# Altium PCB OHIS_FT65E.PcbDoc
Units mm, origin at the board's own origin, x right, y up, seen from the top; angles counter-clockwise.
Board outline 42.5 x 25 mm, 4 copper layers (Top Layer, Layer 2, Layer 3, Bottom Layer), stack 1.513 mm thick; 35 components, 25 nets, 91 pads, 100 vias.
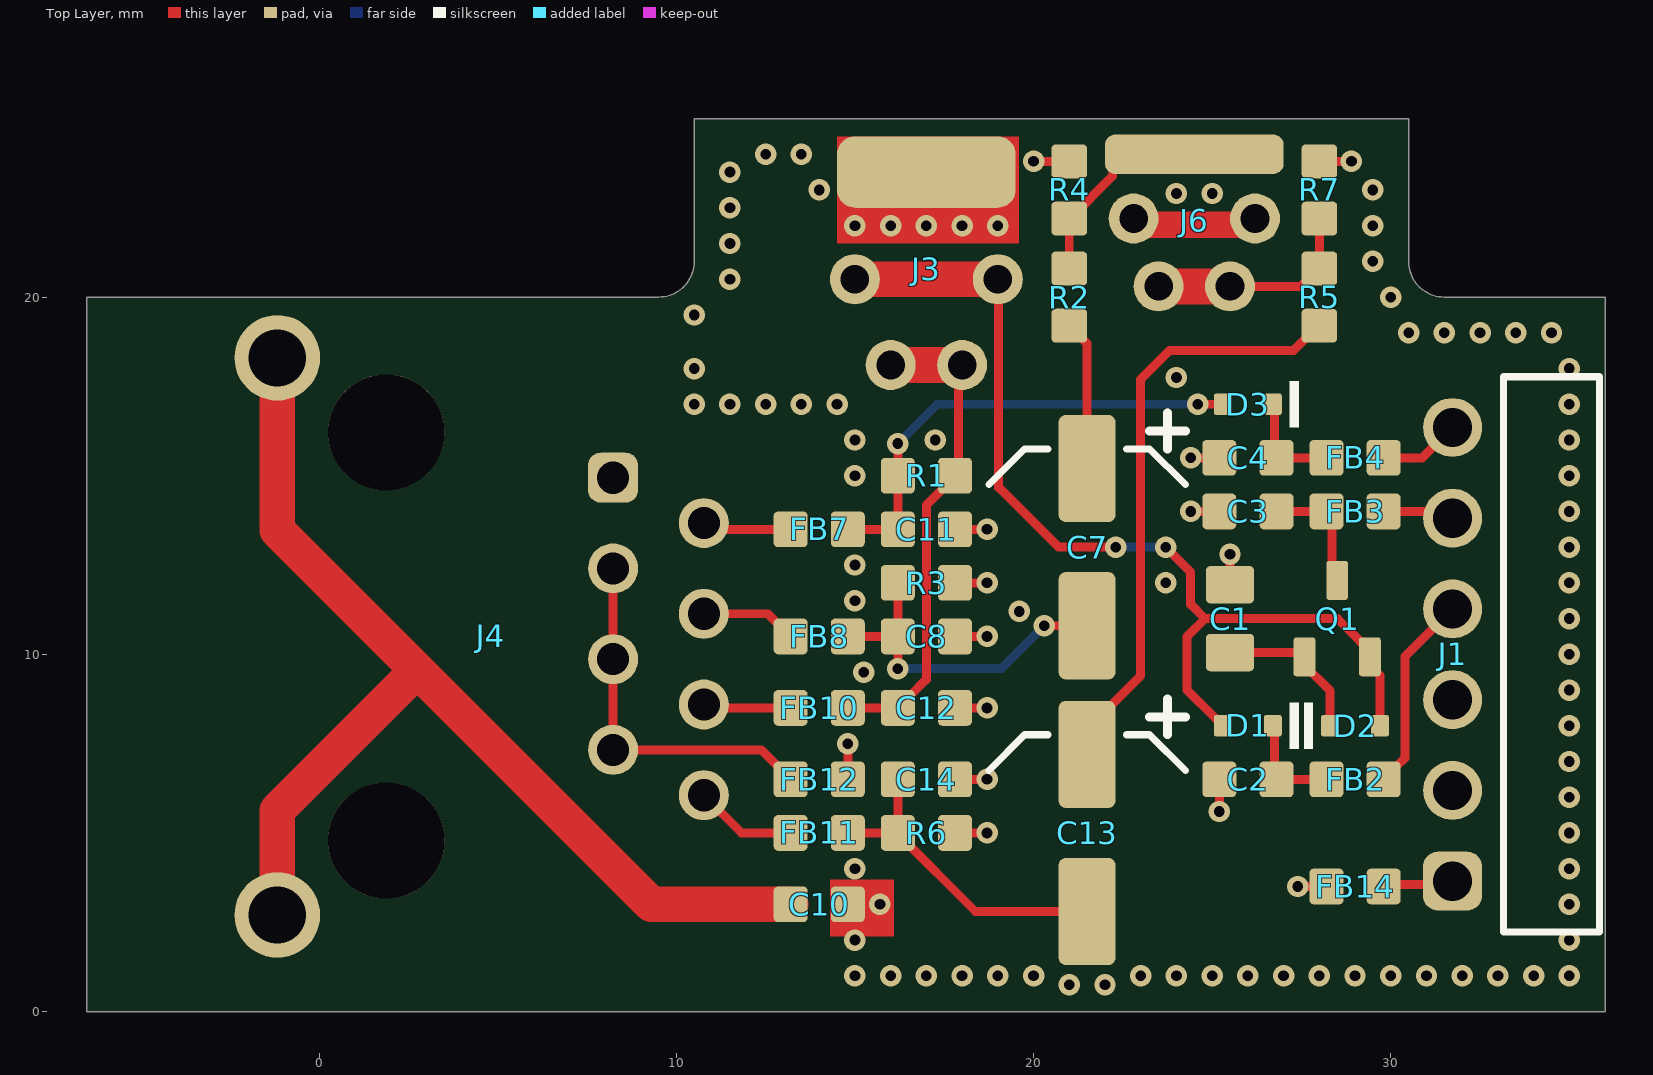
[diagram p0: Top Layer view]
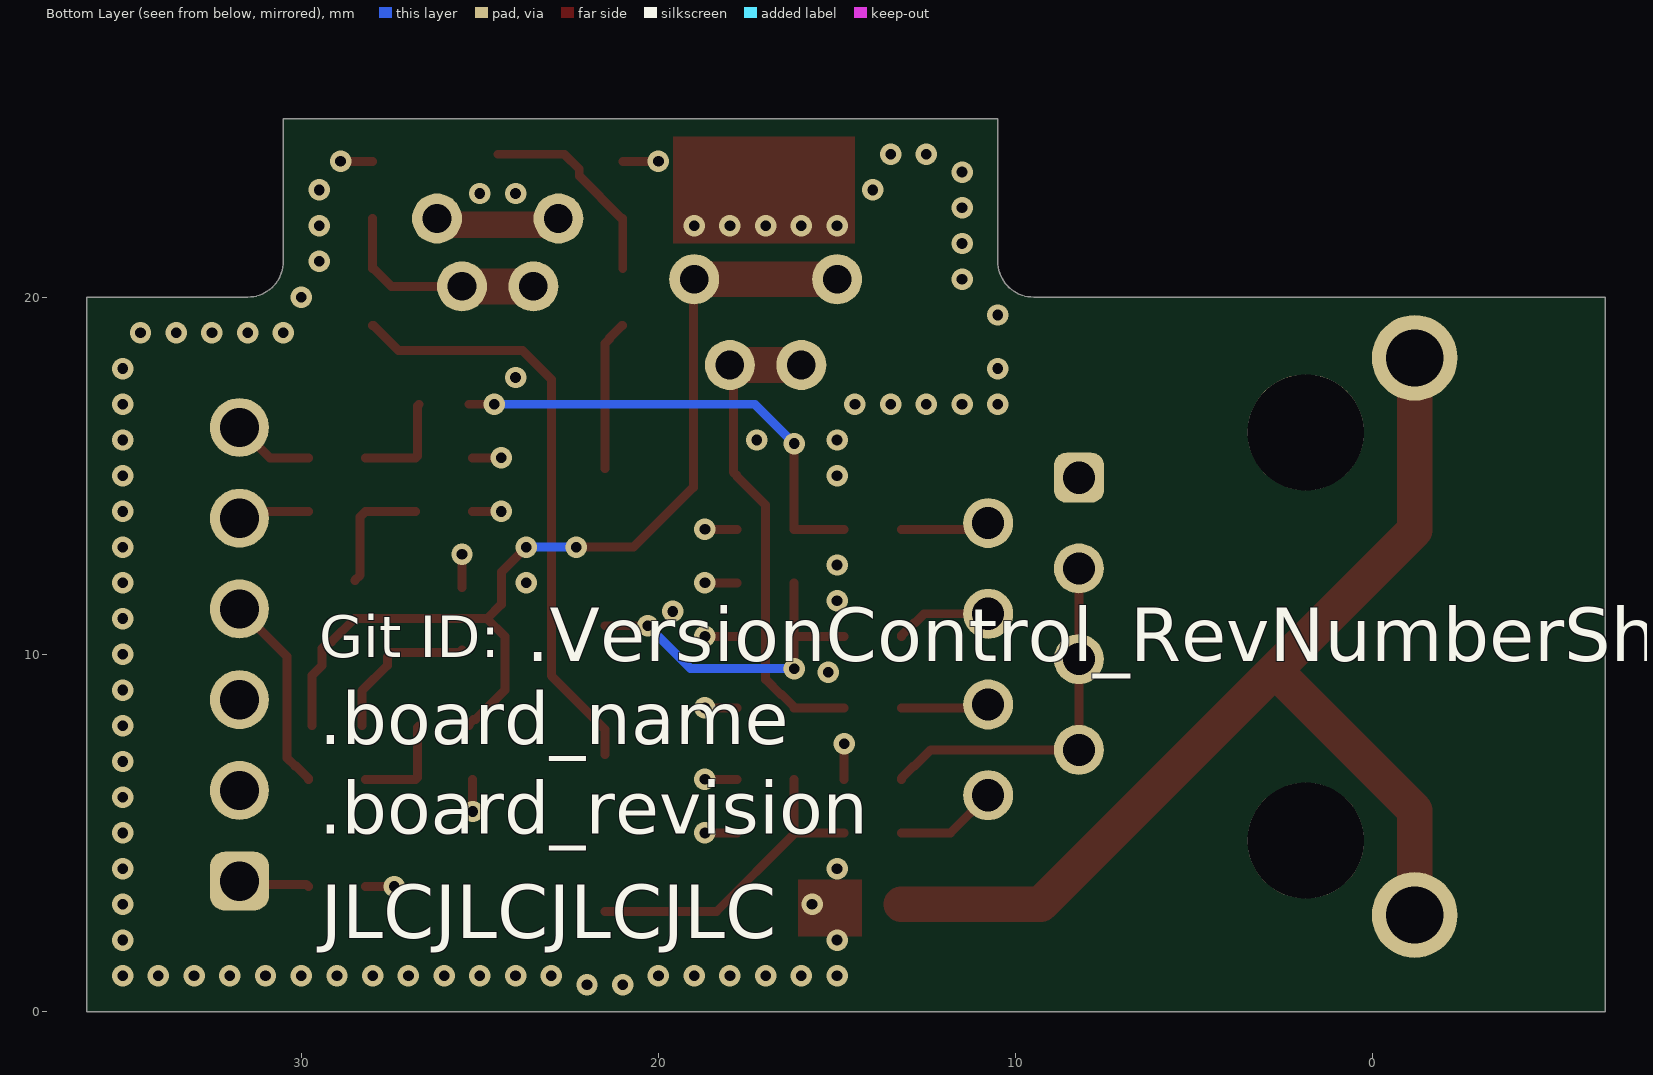
[diagram p1: Bottom Layer view, seen from below]
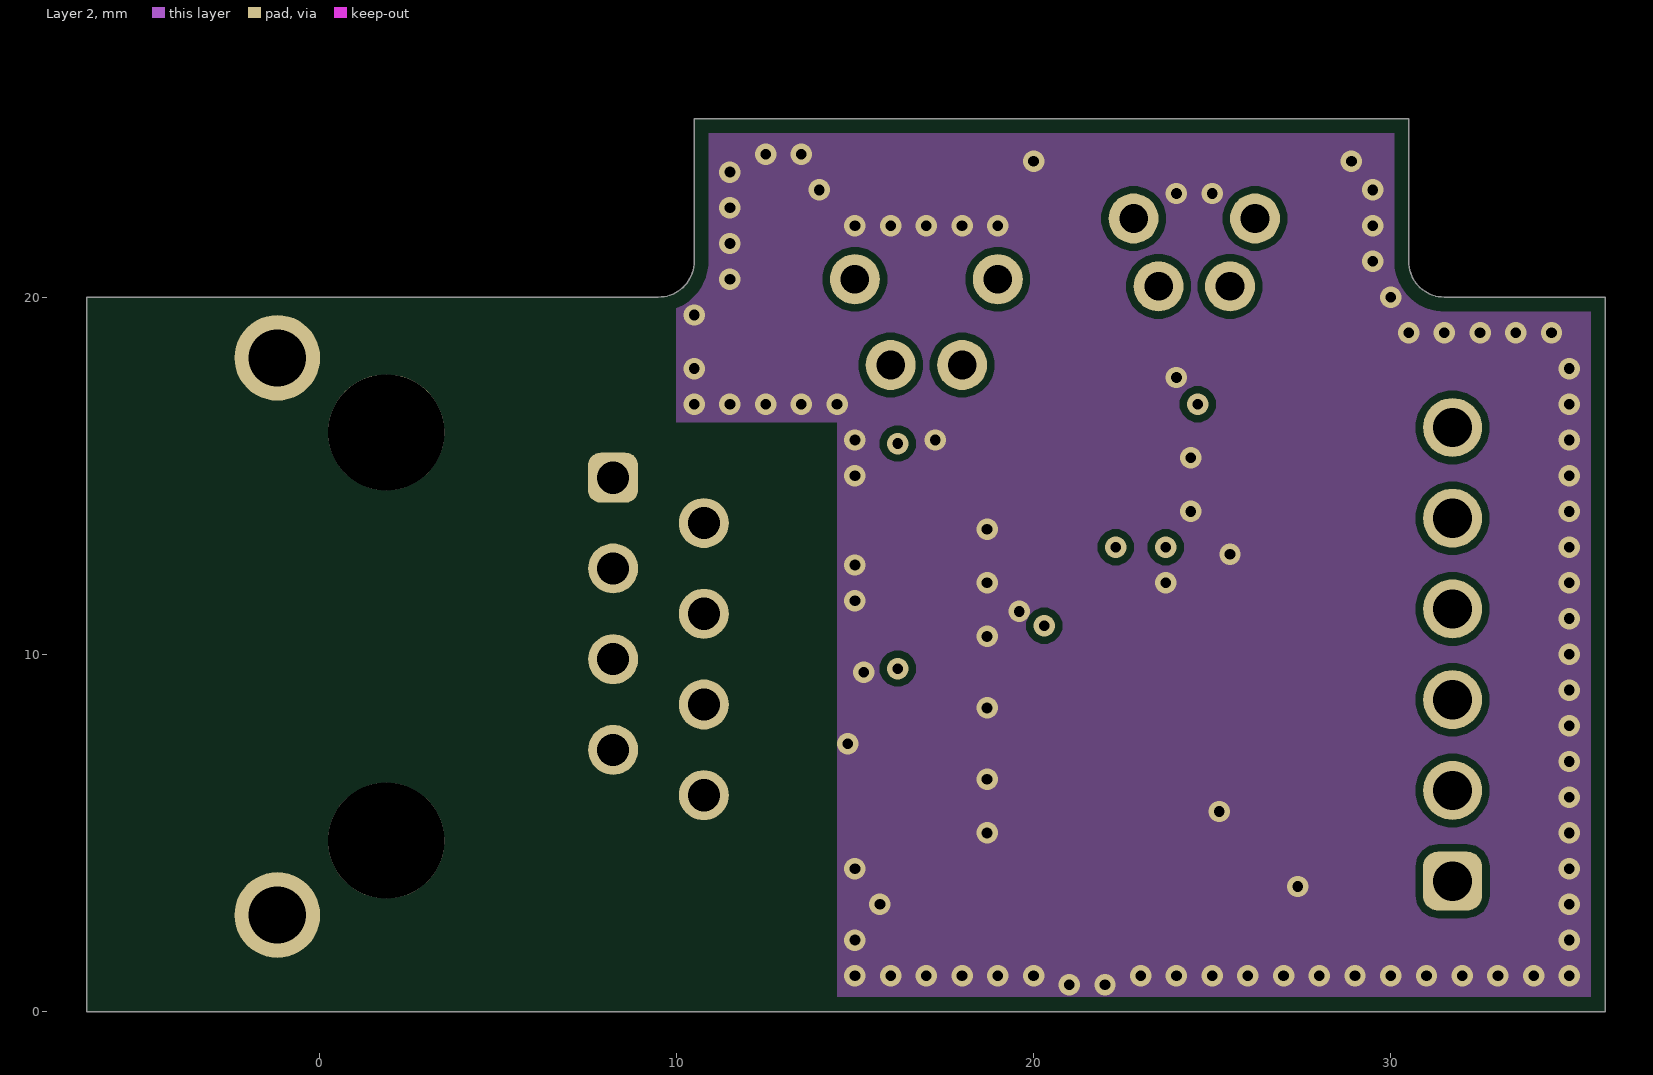
[diagram p2: Layer 2]
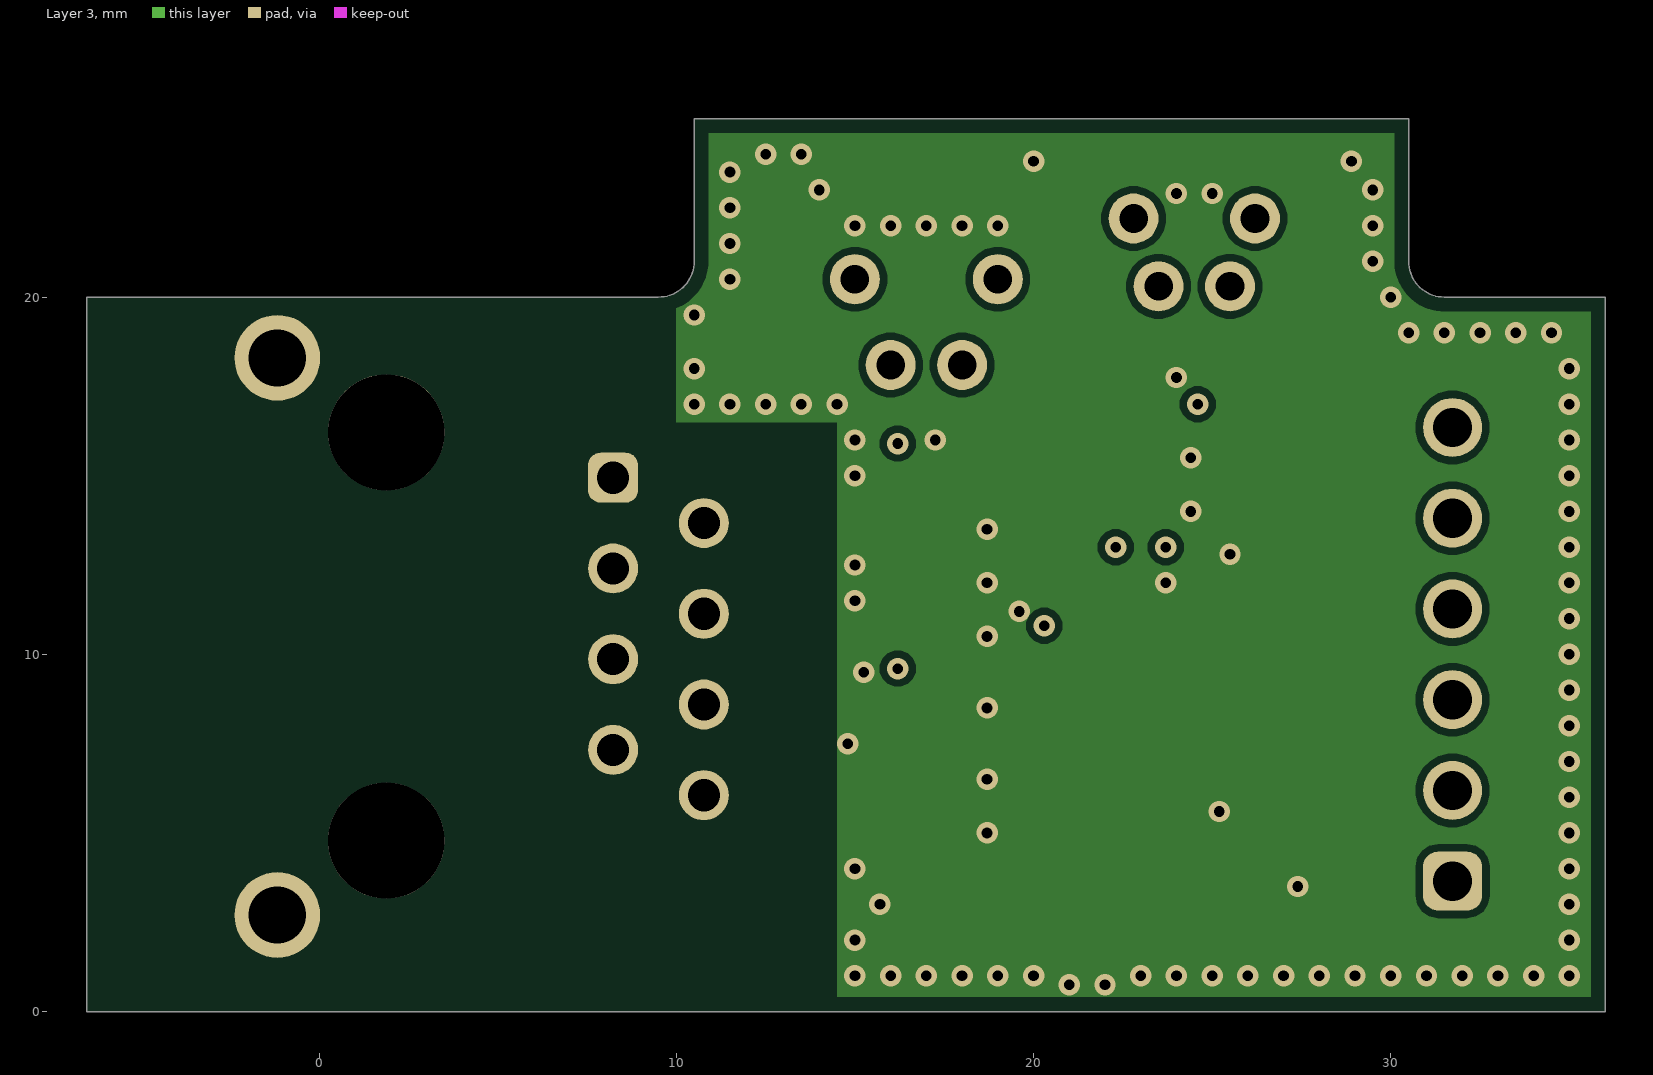
[diagram p3: Layer 3]
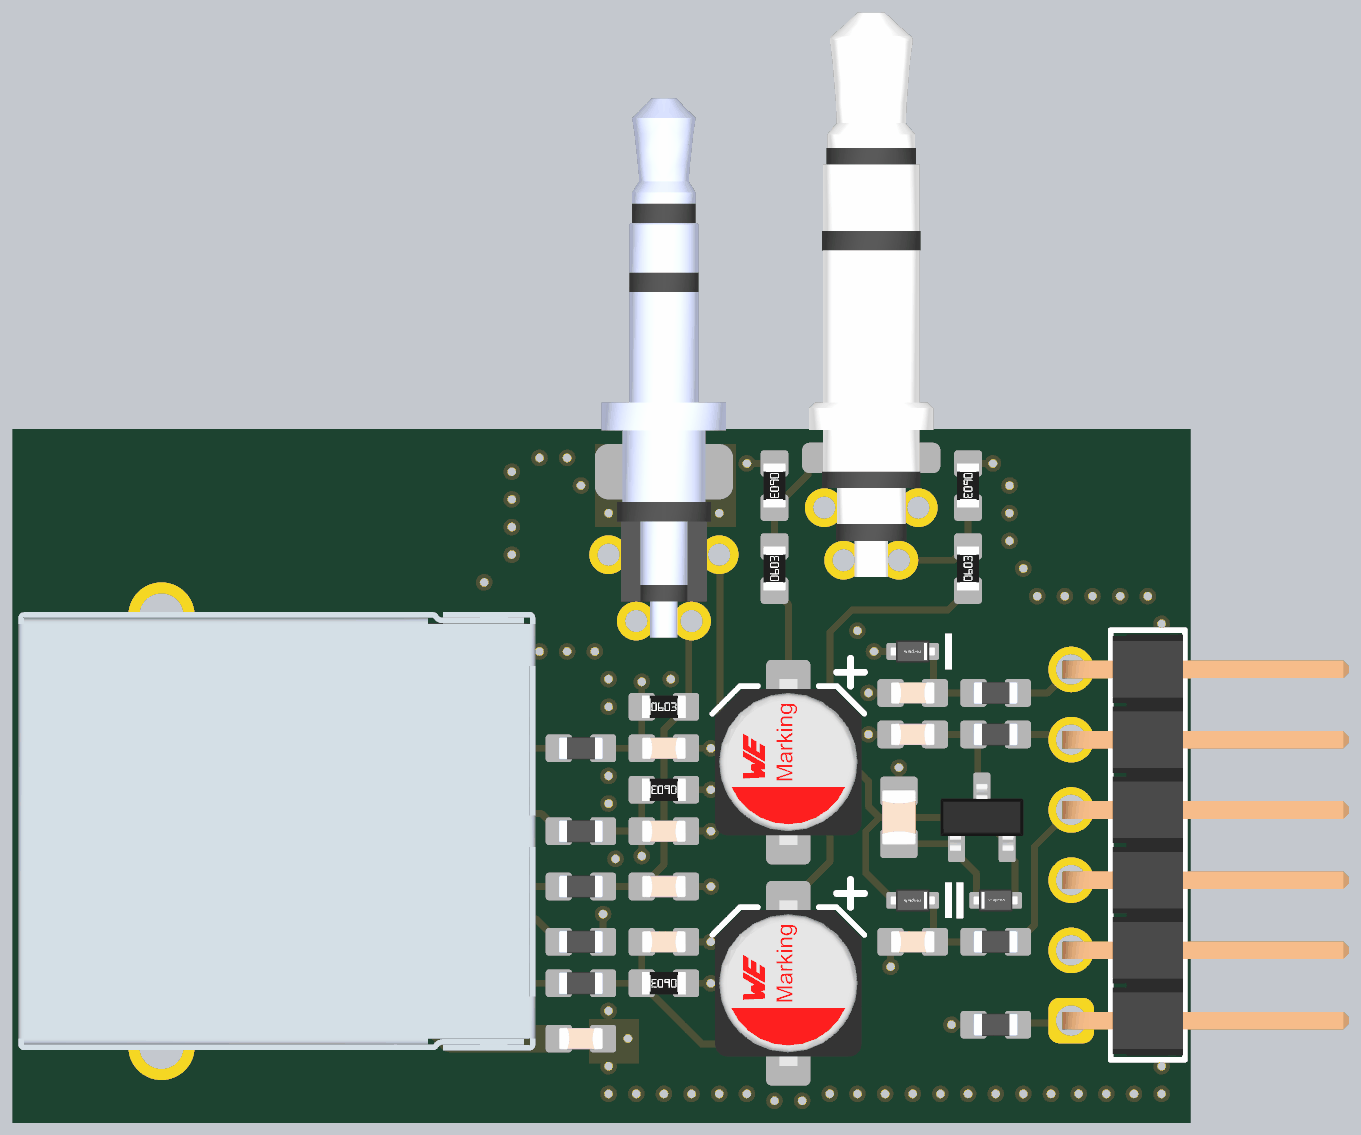
[diagram p4: 3D render of the assembled board from above, using the file's embedded part models]

## Layer stack, top to bottom
Top Solder: solder mask 0.0254, SM-001, Dk 4
Top Layer: signal copper 0.035
Dielectric 2: prepreg 0.2083, PP-022, Dk 4.5
Layer 2: signal copper 0.018
Dielectric 3: core 0.9906, Core-042, Dk 4.6
Layer 3: signal copper 0.018
Dielectric 5: prepreg 0.2083, PP-022, Dk 4.5
Bottom Layer: signal copper 0.035
Bottom Solder: solder mask 0.0254, SM-001, Dk 4

## Board outline
-6.5,0 -6.5,20 9.5,20 ccw(c9.5,21) 10.5,21 10.5,25 30.5,25 30.5,21 ccw(c31.5,21) 31.5,20 36,20 36,0

## Design rules (kind name [scope] priority, off if disabled: settings)
BoardOutlineClearance [IsElectrical or IsPoly] p1: gap=0.4 ignorepadtopadclearanceinfootprint=FALSE
Clearance Clearance_NTPH_to_Track [IsTrack vs IsPad and IsThruPin and not PadIsPlated] p1: gap=0.254 ignorepadtopadclearanceinfootprint=TRUE
Clearance Clearance_TH_Pad_to_TH_Pad [IsPad and IsThruPin vs IsPad and IsThruPin] p2: gap=0.5 ignorepadtopadclearanceinfootprint=TRUE
Clearance Clearance_SMT_Pad_to_SMT_Pad [IsPad and IsSMTPin vs IsPad and IsSMTPin] p3: gap=0.2 ignorepadtopadclearanceinfootprint=TRUE
Clearance [All] p4: gap=0.2 ignorepadtopadclearanceinfootprint=FALSE
DiffPairsRouting HDMI [InDifferentialPairClass('HDMI')] p1: maxlimit=0.254 minlimit=0.2 mostfreqgap=0.254 toplayer_maxgap=0.2 toplayer_prefgap=0.2 toplayer_minwidth=0.207 toplayer_maxwidth=0.207 toplayer_prefwidth=0.207 midlayer1_minwidth=0.381 midlayer1_maxwidth=0.381 midlayer1_prefwidth=0.381 midlayer2_minwidth=0.381 midlayer2_maxwidth=0.381 midlayer2_prefwidth=0.381 bottomlayer_maxgap=0.2 bottomlayer_prefgap=0.2 bottomlayer_minwidth=0.207 bottomlayer_maxwidth=0.207 bottomlayer_prefwidth=0.207 impedanceprofiledriven=TRUE impedanceprofileid={C10371E8-B84A-4044-89B9-1F0E894B0926} maxuncoupledlength=12.7
DiffPairsRouting ETH [InDifferentialPairClass('ETH')] p2: maxlimit=0.254 minlimit=0.2 mostfreqgap=0.254 toplayer_maxgap=0.2 toplayer_prefgap=0.2 toplayer_minwidth=0.207 toplayer_maxwidth=0.207 toplayer_prefwidth=0.207 midlayer1_minwidth=0.381 midlayer1_maxwidth=0.381 midlayer1_prefwidth=0.381 midlayer2_minwidth=0.381 midlayer2_maxwidth=0.381 midlayer2_prefwidth=0.381 bottomlayer_maxgap=0.2 bottomlayer_prefgap=0.2 bottomlayer_minwidth=0.207 bottomlayer_maxwidth=0.207 bottomlayer_prefwidth=0.207 impedanceprofiledriven=TRUE impedanceprofileid={C10371E8-B84A-4044-89B9-1F0E894B0926} maxuncoupledlength=12.7
DiffPairsRouting USB [InDifferentialPairClass('USB')] p3: maxlimit=0.2 minlimit=0.2 mostfreqgap=0.2 toplayer_minwidth=0.272 toplayer_maxwidth=0.272 toplayer_prefwidth=0.272 midlayer1_minwidth=0.381 midlayer1_maxwidth=0.381 midlayer1_prefwidth=0.381 midlayer2_minwidth=0.381 midlayer2_maxwidth=0.381 midlayer2_prefwidth=0.381 bottomlayer_minwidth=0.272 bottomlayer_maxwidth=0.272 bottomlayer_prefwidth=0.272 impedanceprofiledriven=TRUE impedanceprofileid={14A1D308-0AEB-453A-BA91-52939657512A} maxuncoupledlength=12.7
HoleSize NPTH_HoleSize [IsPad And not PadIsPlated] p1: absolutevalues=TRUE maxlimit=3.7 minlimit=0.2 maxpercent=80.000 minpercent=20.000
HoleSize Pad_HoleSize [IsPad] p2: absolutevalues=TRUE maxlimit=2.8 minlimit=0.5 maxpercent=80.000 minpercent=20.000
HoleSize Via_HoleSize [IsVia] p3: absolutevalues=TRUE maxlimit=6.3 minlimit=0.2 maxpercent=80.000 minpercent=20.000
HoleToHoleClearance [All] p1: gap=0.254 allowstackedmicrovias=FALSE
MatchedLengths InterPair_skew_HDMI [InDifferentialPairClass('HDMI')] p1: tolerance=1 checknetsindiffpair=FALSE checkdiffpairvsdiffpair=TRUE checkxsignals=TRUE checkothers=TRUE
MatchedLengths IntraPair_skew_all_DiffPairs [InDifferentialPairClass('All Differential Pairs')] p2: tolerance=0.15 checknetsindiffpair=TRUE checkdiffpairvsdiffpair=FALSE checkxsignals=FALSE checkothers=FALSE
MinimumAnnularRing [All] p1: minimumring=0.13
MinimumSolderMaskSliver [All] p1: minsoldermaskwidth=0.2
PolygonConnect [All] p1: thpad.connectstyle=Relief thpad.reliefconductorwidth=0.5 thpad.reliefentries=4 thpad.polygonreliefangle="90 Angle" thpad.airgapwidth=0.254 smdpad.connectstyle=Direct smdpad.reliefconductorwidth=0.5 smdpad.reliefentries=4 smdpad.polygonreliefangle="90 Angle" smdpad.airgapwidth=0.254 via.connectstyle=Direct via.reliefconductorwidth=0.5 via.reliefentries=4 via.polygonreliefangle="90 Angle" via.airgapwidth=0.254
RoutingVias [All] p1: holewidth=0.3 width=0.6 viastyle="Through Hole" minholewidth=0.2 minwidth=0.4 maxholewidth=0.711 maxwidth=1.27
SilkToSolderMaskClearance [IsPad] p1: minsilkscreentomaskgap=0.2 clearancetoexposedcopper=TRUE
SolderMaskExpansion SolderMaskExpansion_Via [IsVia] p1: expansion=0.102 istentingtop=TRUE
SolderMaskExpansion SolderMaskExpansion_notVia [not IsVia] p2: expansion=0.05 istentingtop=FALSE
Width [All] p1: maxlimit=2.5 minlimit=0.2 preferedwidth=0.33
25 further rules are at their usual default settings.

## Components (designator, comment, footprint, x,y, rotation, side; value= is the part's Value field where it differs from the comment)
C1 "Capacitor 1µF +/-10% 10V X7R 0805" 0805-C-N 25.5,11 r270 top value=1µF
C2 "Capacitor 1nF +/-10% 50V X7R 0603" 0603-C-N 26,6.5 r0 top value=1nF
C3 "Capacitor 1nF +/-10% 50V X7R 0603" 0603-C-N 26,14 r0 top value=1nF
C4 "Capacitor 1nF +/-10% 50V X7R 0603" 0603-C-N 26,15.5 r0 top value=1nF
C7 "865080142007" WCAP-ASLI_D5H5.5 21.5,13 r270 top
C8 "Capacitor 100nF +/-10% 50V X7R 0603" 0603-C-N 17,10.5 r180 top value=100nF
C10 "Capacitor 100nF +/-10% 50V X7R 0603" 0603-C-N 14,3 r180 top value=100nF
C11 "Capacitor 1nF +/-10% 50V X7R 0603" 0603-C-N 17,13.5 r180 top value=1nF
C12 "Capacitor 1nF +/-10% 50V X7R 0603" 0603-C-N 17,8.5 r180 top value=1nF
C13 "865080142007" WCAP-ASLI_D5H5.5 21.5,5 r270 top
C14 "Capacitor 100nF +/-10% 50V X7R 0603" 0603-C-N 17,6.5 r180 top value=100nF
D1 "1PS79SB30,115" FP-SOD523-MFG 26,8 r180 top
D2 "1PS79SB30,115" FP-SOD523-MFG 29,8 r0 top
D3 "1PS79SB30,115" FP-SOD523-MFG 26,17 r180 top
FB2 "742792662" 0603-FB-N 29,6.5 r180 top
FB3 "742792662" 0603-FB-N 29,14 r180 top
FB4 "742792662" 0603-FB-N 29,15.5 r180 top
FB7 "742792662" 0603-FB-N 14,13.5 r0 top
FB8 "742792662" 0603-FB-N 14,10.5 r0 top
FB10 "742792662" 0603-FB-N 14,8.5 r0 top
FB11 "742792662" 0603-FB-N 14,5 r0 top
FB12 "742792662" 0603-FB-N 14,6.5 r0 top
FB14 "742792662" 0603-FB-N 29,3.5 r180 top
J1 "61300611021" 61300611021 34.5,10 r90 top
J3 "SP-2533-01" SP-2533-01-Footprint-1 17,25 r90 top locked
J4 "615008140121" 615008140121 3,10.5 r270 top
J6 "SP-3533-01" SP-3533-01-Footprint-1 24.5,25 r90 top locked
Q1 "FDV301N" SOT-23-3-N 28.5,11 r90 top
R1 "Resistor 2k +/-1% 50V 0603" 0603-R-N 17,15 r0 top value=2k
R2 "Resistor 39R 0603 +/-1%, 0.1W" 0603-R-N 21,20 r90 top value=39R
R3 "Resistor 10k +/-1% 50V 0603" 0603-R-N 17,12 r180 top value=10k
R4 "Resistor 10k +/-1% 50V 0603" 0603-R-N 21,23 r270 top value=10k
R5 "Resistor 39R 0603 +/-1%, 0.1W" 0603-R-N 28,20 r90 top value=39R
R6 "Resistor 10k +/-1% 50V 0603" 0603-R-N 17,5 r180 top value=10k
R7 "Resistor 10k +/-1% 50V 0603" 0603-R-N 28,23 r270 top value=10k

## Footprints (in the part's own frame and the unit in brackets; to place one, negate y for a bottom-side part, rotate by r counter-clockwise, add the part's x,y. Pads: shape width x height; smd on the part's side, far side on the other; paste and mask are expansions set on the pad)
0603-C-N [mm]
  rrect25% 0.95x1 smd: 1(-0.8,0) 2(0.8,0)
  body extent -0.8,-0.4 0.8,0.4, height 0.81
0603-FB-N [mm]
  rrect25% 0.95x1 smd: 1(-0.8,0) 2(0.8,0)
  body extent -0.8,-0.4 0.8,0.4, height 0.8
0603-R-N [mm]
  rrect25% 0.95x1 smd: 1(-0.8,0) 2(0.8,0)
  body extent -0.8,-0.4 0.8,0.4, height 0.47
0805-C-N [mm]
  rrect25% 1.05x1.35 smd: 1(-0.95,0) 2(0.95,0)
  body extent -1,-0.63 1,0.63, height 1.26
61300611021 [mm] "Pin Header, pitch 2.54 mm, THT, Angled, single row, 6p"
  rrect50% 1.65x1.65 hole 1.1: 1(-6.35,2.77)
  round 1.65 hole 1.1: 2(-3.81,2.77) 3(-1.27,2.77) 4(1.27,2.77) 5(3.81,2.77) 6(6.35,2.77)
  silkscreen extent -7.77,-1.35 7.77,1.35, body extent -7.62,-7.27 7.62,3.09, height 2.58
615008140121 [mm] "Modular Jack Horizontal Shielded 8P8C Tab Down"
  rrect50% 1.4x1.4 hole 0.9: 1(-4.445,5.23)
  round 1.4 hole 0.9: 2(-3.175,7.77) 3(-1.905,5.23) 4(-0.635,7.77) 5(0.635,5.23) 6(1.905,7.77) 7(3.175,5.23) 8(4.445,7.77)
  round 3.25 hole 3.25 unplated: M1(-5.715,-1.12) M2(5.715,-1.12)
  round 2.4 hole 1.6: S1(-7.8,-4.17) S2(7.8,-4.17)
  body extent -7.93,-9.35 7.93,9.35, height 11.93
FP-SOD523-MFG [mm]
  rrect25% 0.5x0.6 smd: 1(-0.7,0) 2(0.7,0)
  silkscreen extent -1.43,-0.65 -1.17,0.64, body extent -1.07,-0.6 1.07,0.6, height 0.25
SOT-23-3-N [mm] "SOT-23, 3-Leads, Body 3x1.4mm, Pitch 0.95mm, IPC Medium Density"
  rrect25% 1.09x0.61 smd: 1(-1.07,0.915) 2(-1.07,-0.915) 3(1.07,0)
  body extent -1.22,-1.5 1.22,1.5, height 1
SP-2533-01-Footprint-1 [mm]
  rrect50% 2x5 smd: 1(-1.5,0)
  round 1.4 hole 0.8: 2A(-6.9,1) 2B(-6.9,-1) 3A(-4.5,2) 3B(-4.5,-2)
  body extent -7.5,-2.24 12,2.24, height 3.96
SP-3533-01-Footprint-1 [mm]
  rrect50% 1.1x5 smd: 1(-1,0)
  round 1.4 hole 0.8: 2A(-4.7,1) 2B(-4.7,-1) 3A(-2.8,1.7) 3B(-2.8,-1.7)
  body extent -5.3,-2.24 15.1,2.24, height 3.84
WCAP-ASLI_D5H5.5 [mm] "Aluminium Electrolytic V-Chip SMT Capacitors, 5x5.5mm"
  rrect25% 3x1.6 smd: 1(-2.2,0) 2(2.2,0)
  silkscreen extent -3.75,-2.75 -1.75,2.75, body extent -3,-2.65 3,2.65, height 5.5

## Part data
C1: library part CMP-072-000659-14, "WCAP-CSGP Multilayer Ceramic Chip Capacitor, General Purpose, size 0805, X7R, 1µF, 10VDC", Capacitor Type=MLCC, Case/Package=0805, Dielectric=X7R, Insulation Resistance=0.5GO, JLCPCB Part #=C28323, Max Operating Temperature=125°C, Min Operating Temperature=-55°C, Tolerance=10%, Voltage Rating=10V, ComponentLink1Description="Website Link", ComponentLink1URL=https://www.we-online.com/redexpert/article/885012207022?ad, ComponentLink2Description="Datasheet Link", ComponentLink2URL=https://www.we-online.com/redexpert/spec/885012207022?ad, Design Item ID=885012207022, Dissipation Factor=5%, Height=1.25mm, Length=2mm, Match Code=WCAP-CSGP, Mounting Technology=SMT, Packaging="Tape and Reel", Pins=2, Source=WCAP-CSGP.SchLib, Technical Reference=X7R0805105K010DFCT10000, Usage="General Purpose", Width=1.25mm
C2 C3 C4 C11 C12: library part CMP-072-000605-13, "WCAP-CSGP Multilayer Ceramic Chip Capacitor, General Purpose, size 0603, X7R, 1nF, 50VDC", Capacitor Type=MLCC, Case/Package=0603, Dielectric=X7R, Insulation Resistance=10GO, JLCPCB Part #=C1588, Max Operating Temperature=125°C, Min Operating Temperature=-55°C, Tolerance=10%, Voltage Rating=50V, ComponentLink1Description="Website Link", ComponentLink1URL=https://www.we-online.com/redexpert/article/885012206083?ad, ComponentLink2Description="Datasheet Link", ComponentLink2URL=https://www.we-online.com/redexpert/spec/885012206083?ad, Design Item ID=885012206083, Dissipation Factor=2.5%, Height=0.8mm, Length=1.6mm, Match Code=WCAP-CSGP, Mounting Technology=SMT, Packaging="Tape and Reel", Pins=2, Source=WCAP-CSGP.SchLib, Technical Reference=X7R0603102K050DFCT10000, Usage="General Purpose", Width=0.8mm
C7 C13: library part CMP-112-000006-2, "WCAP-ASLI Aluminum Electrolytic Capacitor, V-Chip, D5 x H5.5mm, 100uF, 6.3V", Capacitance=100uF, Capacitance Tolerance=+/-20%, Leakage Current=6.3uA, Manufacturer="Wurth Elektronik", Operating Temperature Max=105°C, Operating Temperature Min=-55°C, Rated Voltage (DC)=6.3V, Ripple Current=170mA, Category="Aluminum Electrolytic Capacitors", Component Type=Standard, ComponentLink1Description="Website Link", ComponentLink1URL=https://www.we-online.com/redexpert/article/865080142007?ad, ComponentLink2Description="Datasheet Link", ComponentLink2URL=https://www.we-online.com/redexpert/spec/865080142007?ad, Design Item ID=865080142007, Diameter=5mm, Dissipation Factor=24%, Endurance=2000h, Height=5.5mm, Manufacturer Part Number=865080142007, Match Code=WCAP-ASLI, Mount="Surface Mount", Packaging="Tape and Reel", Pin Count=2, Source=WCAP-ASLI.SchLib, Technical Reference=ASEC055101M6R3DVCTBB000
C8 C10 C14: library part CMP-001-00017-19, "Capacitor MLCC, General Purpose, size 0603, X7R, 100nF, +/-10%, 50V", Capacitor Type=MLCC, Case/Package=0603, Dielectric=X7R, JLCPCB Part #=C14663, Max Operating Temperature=125°C, Min Operating Temperature=-55°C, Tolerance=10%, Voltage Rating=50V, Height=0.8mm, Length=1.6mm, Mounting Technology=SMT, Pins=2, RoHS Compliant=True, Usage="General Purpose", Width=0.8mm
D1 D2 D3: library part CMP-004-00048-7, "VR=40V IF=200mA 20pF", Case/Package=SOD-523, Forward Current=200mA, Forward Voltage="600 mV @ 200 mA", JLCPCB Part #=C426690, Max Repetitive Reverse Voltage (Vrrm)=40V, RoHS Compliant=Yes
FB2 FB3 FB4 FB7 FB8 FB10 FB11 FB12 FB14: library part CMP-066-000126-6, "WE-CBF SMT EMI Suppression Ferrite Bead, size 0603, 1000O, 0.83A", Case/Size Code=0603, DC Resistance Max=0.3O, JLCPCB Part #=C180490, Manufacturer="Wurth Elektronik", Operating Temperature Max=125°C, Operating Temperature Min=-55°C, Rated Current=0.83A, Category="Ferrites for PCB Assembly", Component Type=Standard, ComponentLink1Description="Website Link", ComponentLink1URL=https://www.we-online.com/redexpert/article/742792662?ad, ComponentLink2Description="Datasheet Link", ComponentLink2URL=https://www.we-online.com/redexpert/spec/742792662?ad, Design Item ID=742792662, Height=0.8mm, Impedance @100MHz=1000O, Impedance Max=1050O, Impedance Max Test Condition=120MHz, Length=1.6mm, Manufacturer Part Number=742792662, Match Code=WE-CBF, Mount="Surface Mount", Packaging="Tape and Reel", Pin Count=2, Source=WE-CBF.SchLib, Type="Wide Band", Width=0.8mm
J1: library part CMP-045-000152-3, "WR-PHD Pin Header, THT, pitch 2.54mm, Single Row, Angled, 6p", Contact Resistance=20mOhm, JLCPCB Part #=-, Manufacturer="Wurth Elektronik", Operating Temperature="-40 to +105degC", Rated Current=3A, Withstanding Voltage=500VAC, Working Voltage=250VAC, Component Type=Standard, ComponentLink1Description=Manufacturer, ComponentLink1URL=http://www.we-online.de, ComponentLink2Description=Datasheet, ComponentLink2URL=https://www.we-online.com/catalog/datasheet/61300611021.pdf, Design Item ID=61300611021, Gender="Pin Header", Manufacturer Part Number=61300611021, Mounting Technology=THT, Orientation=Angled, Packaging=Bag, Pin Count=6, Pin Number=6, Pitch=2.54mm, Row Number=Single, Source="WR-PHD_Pin Header.SchLib"
J3: library part CMP-002-00129-3, "2.5 mm, Stereo, Overmold, Audio Plug Connector", Current Rating=1A, Insulation Color=Black, Max Operating Temperature=70°C, Min Operating Temperature=-25°C, Body Material=Brass, Connector Type=Plug, Contact Material=Brass, Contact Plating=Nickel, Gender=Male, Mounting Technology="Free Hanging", Packaging=Bulk, Shielding=Unshielded, Termination=Solder
J4: library part CMP-059-000021-2, "WR-MJ Modular Jack THT Horizontal Shielded Front Grounding Post 8P8C Tab Down", Contact Resistance=20mOhm, Insulation Resistance=500MOhm, JLCPCB Part #=C3010555, Manufacturer="Wurth Elektronik", Operating Temperature Max=85°C, Operating Temperature Min=-40°C, Rated Current=1.5A, Withstanding Voltage=1000VAC, Working Voltage=120VAC, Category="Input/Output Connectors", Component Type=Standard, ComponentLink1Description="Manufacturer Link", ComponentLink1URL=https://www.we-online.com/redexpert/article/615008140121?ad, ComponentLink2Description=Datasheet, ComponentLink2URL=https://www.we-online.com/redexpert/spec/615008140121?ad, Design Item ID=615008140121, LED=No, Manufacturer Part Number=615008140121, Match Code=WR-MJ, Mount="Through Hole", Number of Pins=8P8C, Number of Ports=1, Orientation=Horizontal, Packaging=Tray, Pin Count=9, Shielding=Yes, Source=WR-MJ.SchLib
J6: library part CMP-002-00130-2, "3.5 mm, Stereo, Overmold, Audio Plug Connector", Current Rating=1A, Insulation Color=Black, Max Operating Temperature=70°C, Min Operating Temperature=-25°C, Body Material=Brass, Connector Type=Plug, Contact Material=Brass, Contact Plating=Nickel, Gender=Male, Housing Material=Brass, Mounting Technology="Free Hanging", Packaging=Bulk, RoHS Compliant=Yes, Shielding=Unshielded, Termination=Solder
Q1: library part CMP-013-00055-10, "Transistor MOSFET N-Ch. 25V 220mA 0, 35W 4Ohm SOT23", Case/Package=SOT-23-3, Continuous Drain Current (ID)=220mA, Drain to Source Resistance=5R, Drain to Source Voltage (Vdss)=25V, Gate to Source Voltage (Vgs)=8V, Input Capacitance=9.5pF, JLCPCB Part #=C15310, Max Operating Temperature=150°C, Max Power Dissipation=350mW, Min Operating Temperature=-55°C, Package Quantity=3000, Fall Time=6ns, Height=1.2mm, Id - Continuous Drain Current=220mA, Length=2.9mm, Mounting Technology="Surface Mount", Number of Channels=1, Packaging="Tape and Reel", Pins=3, Polarity=N-CHANNEL, Rds On Max=4R, Rise Time=6ns, Series=-, Transistor Type=NMOS, Turn-Off Delay Time=3.5ns, Turn-On Delay Time=3.2ns, Vds Max=25V, Vgs (Max)=8V, Vgs(th) (Max) @ Id="1.06V @250µA", Weight=0.001093oz, Width=1.3mm
R1: library part CMP-009-00298-9, "Chip Resistor, Thick Film, General Purpose, 0603, 100mW, 50V, 2 kOhm, +/-1%", Case/Package=0603, JLCPCB Part #=C22975, Max Operating Temperature=155°C, Min Operating Temperature=-55°C, Power Rating=100mW, Resistor Type="Thick Film", Tolerance=1%, Voltage Rating=50V, Elements=1, Mounting Technology=SMT, Pins=2, Usage="General Purpose"
R2 R5: library part CMP-009-00363-2, "SMD Chip Resistor, 39 Ohm, ± 1%, 100 mW, 0603 [1608 Metric], Thick Film, General Purpose", Case/Package=0603, JLCPCB Part #=C2907161, Max Operating Temperature=155°C, Min Operating Temperature=-55°C, Power Rating=100mW, Resistor Type="Thick Film", Temperature Coefficient=100ppm/°C, Tolerance=1%, Voltage Rating=50V, Elements=1, Features="Moisture Resistant", Lead Free="Lead Free", Mounting Technology=SMT, Pins=2, RoHS Compliant=Yes, Usage="General Purpose"
R3 R4 R6 R7: library part CMP-009-00017-24, "Chip Resistor, Thick Film, General Purpose, 0603, 100mW, 50V, 10 kOhm, +/-1%", Case/Package=0603, JLCPCB Part #=C25804, Max Operating Temperature=155°C, Min Operating Temperature=-55°C, Power Rating=100mW, Resistor Type="Thick Film", Tolerance=1%, Voltage Rating=50V, Elements=1, Mounting Technology=SMT, Pins=2, RoHS Compliant=Yes, Usage="General Purpose"

## Via types
v1: diameter 0.6, hole 0.3, Top Layer to Bottom Layer, tented both sides, 100 vias

## Nets (pads, with @x,y where several pads share a name; then routed paths per layer and width w, separated by ;. In a path a pad name is that pad's centre, name@x,y a point inside that pad or via, vN(x,y) a via of type N, cw(c..) or ccw(c..) an arc to the next point about the centre after c; other vN are vias at no path point)
GND: C1.1 C2.1 C3.1 C4.1 C8.1 C10.1 C11.1 C12.1 C14.1 FB12.2 FB14.2 J3.1 R3.1 R4.1 R6.1 R7.1 | length 13.4
  Top Layer w0.25: C10.1 v1(15.7,3) ; FB12.2 v1(14.8,7.5) ; R6.1 v1(18.7,5) ; C14.1 v1(18.7,6.5) ; C12.1 v1(18.7,8.5) ; C8.1 v1(18.7,10.5) ; R3.1 v1(18.7,12) ; C11.1 v1(18.7,13.5) ; v1(20,23.8) R4.1 ; v1(24.4,14) C3.1 ; v1(24.4,15.5) C4.1 ; v1(25.2,5.6) C2.1 ; C1.1@25.5,11.875 v1(25.5,12.8) ; v1(27.4,3.5) FB14.2 ; R7.1 v1(28.9,23.8)
  other v1: 21,0.75 22,0.75 15,1 16,1 17,1 18,1 19,1 20,1 23,1 24,1 25,1 26,1 27,1 28,1 29,1 30,1 31,1 32,1 33,1 34,1 35,1 15,2 35,2 35,3 15,4 35,4 35,5 35,6 35,7 35,8 35,9 15.25,9.5 35,10 35,11 19.6,11.2 15,11.5 23.7,12 35,12 15,12.5 35,13 35,14 15,15 35,15 15,16 17.25,16 35,16 10.5,17 11.5,17 12.5,17 13.5,17 14.5,17 35,17 24,17.75 10.5,18 35,18 30.5,19 31.5,19 32.5,19 33.5,19 34.5,19 10.5,19.5 30,20 11.5,20.5 29.5,21 11.5,21.5 15,22 16,22 17,22 18,22 19,22 29.5,22 11.5,22.5 24,22.9 25,22.9 14,23 29.5,23 11.5,23.5 12.5,24 13.5,24
HEADPHONE_L: C7.2 C8.2 FB8.2 R3.2 | length 9.6
  Top Layer w0.25: FB8.2 C8.2 ; v1(16.2,9.6) C8.2 ; R3.2 C8.2 ; v1(20.3,10.8) C7.2
  Bottom Layer w0.25: v1(16.2,9.6) 19.1,9.6 v1(20.3,10.8)
HEADPHONE_R: C13.2 C14.2 FB11.2 R6.2 | length 9.1
  Top Layer w0.25: FB11.2 R6.2 ; C14.2 R6.2 ; C13.2 18.375,2.8 16.2,4.975 R6.2
MIC_IN: C12.2 FB10.2 J3.2A J3.2B R1.2 | length 13.8
  Top Layer w0.25: FB10.2 C12.2 16.2,8.525 16.55,8.875 16.575,8.875 17,9.3 17,14.175 17.8,14.975 R1.2 17.9,15.1 17.9,18 J3.2B
  Top Layer w1: J3.2A J3.2B
NetC1_2: C1.2 D2.1 Q1.1 | length 4.4
  Top Layer w0.25: C1.2@25.5,10.125 25.579,10.046 27.469,10.046 Q1.1 27.585,9.69 28.3,8.975 D2.1
NetC2_2: C2.2 D1.1 FB2.2 | length 2.9
  Top Layer w0.25: D1.1 26.75,7.95 26.75,6.55 C2.2 FB2.2
NetC3_2: C3.2 FB3.2 Q1.3 | length 3.5
  Top Layer w0.25: C3.2 FB3.2 28.35,13.85 28.35,12.22 Q1.3
NetC4_2: C4.2 D3.1 FB4.2 | length 2.9
  Top Layer w0.25: D3.1 26.75,16.95 26.75,15.55 C4.2 FB4.2
NetC7_1: C7.1 R2.1 | length 4.2
  Top Layer w0.25: R2.1 21.025,19.2 21.375,18.85 21.375,18.825 21.5,18.7 C7.1
NetC10_2: C10.2 J4.S1 J4.S2 | length 32
  Top Layer w1: J4.S2 -1.17,5.63 2.75,9.55 ; J4.S1 -1.17,13.47 2.75,9.55 ; C10.2 9.3,3 2.75,9.55
NetC13_1: C13.1 R5.1 | length 16.7
  Top Layer w0.25: C13.1 21.5,7.9 23,9.4 23,17.7 23.8,18.5 27.275,18.5 27.975,19.2 R5.1
NetFB7_1: FB7.1 J4.2 | length 2.5
  Top Layer w0.25: J4.2 10.945,13.5 FB7.1
NetFB8_1: FB8.1 J4.4 | length 2.7
  Top Layer w0.25: J4.4 12.565,11.135 12.825,10.875 12.85,10.875 13.2,10.525 FB8.1
NetFB10_1: FB10.1 J4.6 | length 2.5
  Top Layer w0.25: J4.6 10.865,8.5 FB10.1
NetFB11_1: FB11.1 J4.8 | length 2.9
  Top Layer w0.25: J4.8 11.825,5 FB11.1
NetFB12_1: FB12.1 J4.3 J4.5 J4.7 | length 10.4
  Top Layer w0.25: J4.3 J4.5 J4.7 12.375,7.325 12.825,6.875 12.85,6.875 13.2,6.525 FB12.1
NetFB14_1: FB14.1 J1.1 | length 2
  Top Layer w0.25: FB14.1 29.859,3.559 31.639,3.559 J1.1
NetJ6_3: J6.3A J6.3B | length 3.4
  Top Layer w0.75: J6.3A J6.3A@22.924,22.076 ; J6.3A@23.1,22.1 23.175,22.025 25.849,22.025 26.024,22.2 J6.3B
PC_RTS: FB4.1 J1.6 | length 2.3
  Top Layer w0.25: FB4.1 30.88,15.5 J1.6
PC_RX: FB3.1 J1.5 | length 2
  Top Layer w0.25: FB3.1 31.54,14 J1.5
PC_TX: FB2.1 J1.4 | length 5.6
  Top Layer w0.25: FB2.1 29.8,6.525 30.15,6.875 30.175,6.875 30.4,7.1 30.4,9.94 J1.4
PTT: C11.2 D3.2 FB7.2 R1.1 | length 13.4
  Top Layer w0.25: FB7.2 C11.2 R1.1 v1(16.2,15.9) ; v1(24.6,17) D3.2
  Bottom Layer w0.25: v1(16.2,15.9) 17.3,17 v1(24.6,17)
SPK_L: J6.1 R2.2 R4.2 | length 5.8
  Top Layer w0.25: R2.2 R4.2 21.025,22.2 22.218,23.393 22.218,23.586 22.631,24 J6.1
SPK_R: J6.2A J6.2B R5.2 R7.2 | length 6.1
  Top Layer w0.25: J6.2B 27.475,20.3 27.975,20.8 R5.2 R7.2
  Top Layer w1: J6.2A J6.2B
TRX: D1.2 D2.2 J3.3A J3.3B Q1.2 | length 28.6
  Top Layer w0.25: J3.3B 19.025,20.475 19.025,14.675 20.7,13 v1(22.3,13) ; v1(23.7,13) 24.4,12.3 24.4,11.4 24.8,11 ; D1.2 25.3,8.05 25.175,8.175 25.125,8.175 24.3,9 24.3,10.5 24.8,11 ; D2.2 29.7,9.405 29.415,9.69 29.415,10.17 29.235,10.35 29.159,10.35 28.509,11 24.8,11
  Top Layer w1: J3.3A J3.3B
  Bottom Layer w0.25: v1(22.3,13) v1(23.7,13)
pads on no net: J1.2 J1.3 J4.1 J4.M1 J4.M2

## Polygon pours and split planes (outlines as drawn)
GND on Layer 2 "GND_L02_P000" (solid, remove dead copper, pour order 0): 10,26 10,16.5 14.5,16.5 14.5,-1 41,-1 41,26
GND on Layer 3 "NONET_L-01_P-001" (solid, remove dead copper, pour order 1): 10,27 10,16.5 14.5,16.5 14.5,-4 44,-4 44,27

## Other copper
Top Layer:
  rectangle net GND: 14.3,2.1 16.1,3.7
  rectangle net GND: 14.5,21.5 19.6,24.5

## Silkscreen, mask and mechanical layers (free items; w line width, h text height)
Bottom Overlay:
  text ".VersionControl_RevNumberShort" at 23.7,9.8 h1.5
  text "Git ID:" at 29.5,9.53 h2
  text ".board_name" at 29.5,7 h2.5
  text ".board_revision" at 29.5,4.5 h2.5
  text "JLCJLCJLCJLC" at 29.45,2.05 h1.5
Board outline:
  the board outline again, w0.1
Fab Notes:
  drawing of 295 lines, arcs and shapes, not listed
  text "Layer" at 50.969,67.481 h1.52
  text "Name" at 61.38,67.481 h1.52
  text "Material" at 84.996,67.481 h1.52
  text "Thickness" at 100.232,67.481 h1.52
  text "Constant" at 116.738,67.481 h1.52
  text "Board Layer Stack" at 131.212,67.481 h1.52
  text "Top Overlay" at 61.38,64.433 h1.52
  text "Top Solder" at 61.38,61.385 h1.52
  text "SM-001" at 84.996,61.385 h1.52
  text "0.025mm" at 100.232,61.385 h1.52
  text "4" at 116.738,61.385 h1.52
  text "1" at 50.969,58.337 h1.52
  text "Top Layer" at 61.38,58.337 h1.52
  text "CF-004" at 84.996,58.337 h1.52
  text "0.035mm" at 100.232,58.337 h1.52
  text "Dielectric 2" at 61.38,55.289 h1.52
  text "PP-022" at 84.996,55.289 h1.52
  text "0.208mm" at 100.232,55.289 h1.52
  text "4.5" at 116.738,55.289 h1.52
  text "2" at 50.969,52.241 h1.52
  text "Layer 2" at 61.38,52.241 h1.52
  text "CF-003" at 84.996,52.241 h1.52
  text "0.018mm" at 100.232,52.241 h1.52
  text "Dielectric 3" at 61.38,49.193 h1.52
  text "Core-042" at 84.996,49.193 h1.52
  text "0.991mm" at 100.232,49.193 h1.52
  text "4.6" at 116.738,49.193 h1.52
  text "3" at 50.969,46.145 h1.52
  text "Layer 3" at 61.38,46.145 h1.52
  text "CF-003" at 84.996,46.145 h1.52
  text "0.018mm" at 100.232,46.145 h1.52
  text "Dielectric 5" at 61.38,43.097 h1.52
  text "PP-022" at 84.996,43.097 h1.52
  text "0.208mm" at 100.232,43.097 h1.52
  text "4.5" at 116.738,43.097 h1.52
  text "4" at 50.969,40.049 h1.52
  text "Bottom Layer" at 61.38,40.049 h1.52
  text "CF-004" at 84.996,40.049 h1.52
  text "0.035mm" at 100.232,40.049 h1.52
  text "Bottom Solder" at 61.38,37.001 h1.52
  text "SM-001" at 84.996,37.001 h1.52
  text "0.025mm" at 100.232,37.001 h1.52
  text "4" at 116.738,37.001 h1.52
  text "Bottom Overlay" at 61.38,33.953 h1.52
  text "Soldermask color : green / Silkscreen color : white / Surface finish : Pb-free HASL / Via covering : tented / Board outline clearance : +/- 0.2mm / PCB Order Nr : replace JLCJLCJLCJLC by correct order nr." at 48.3,1 h6